# EAGLE board Transimpedance_Amp_SchnitzerLab (EAGLE 6.4)
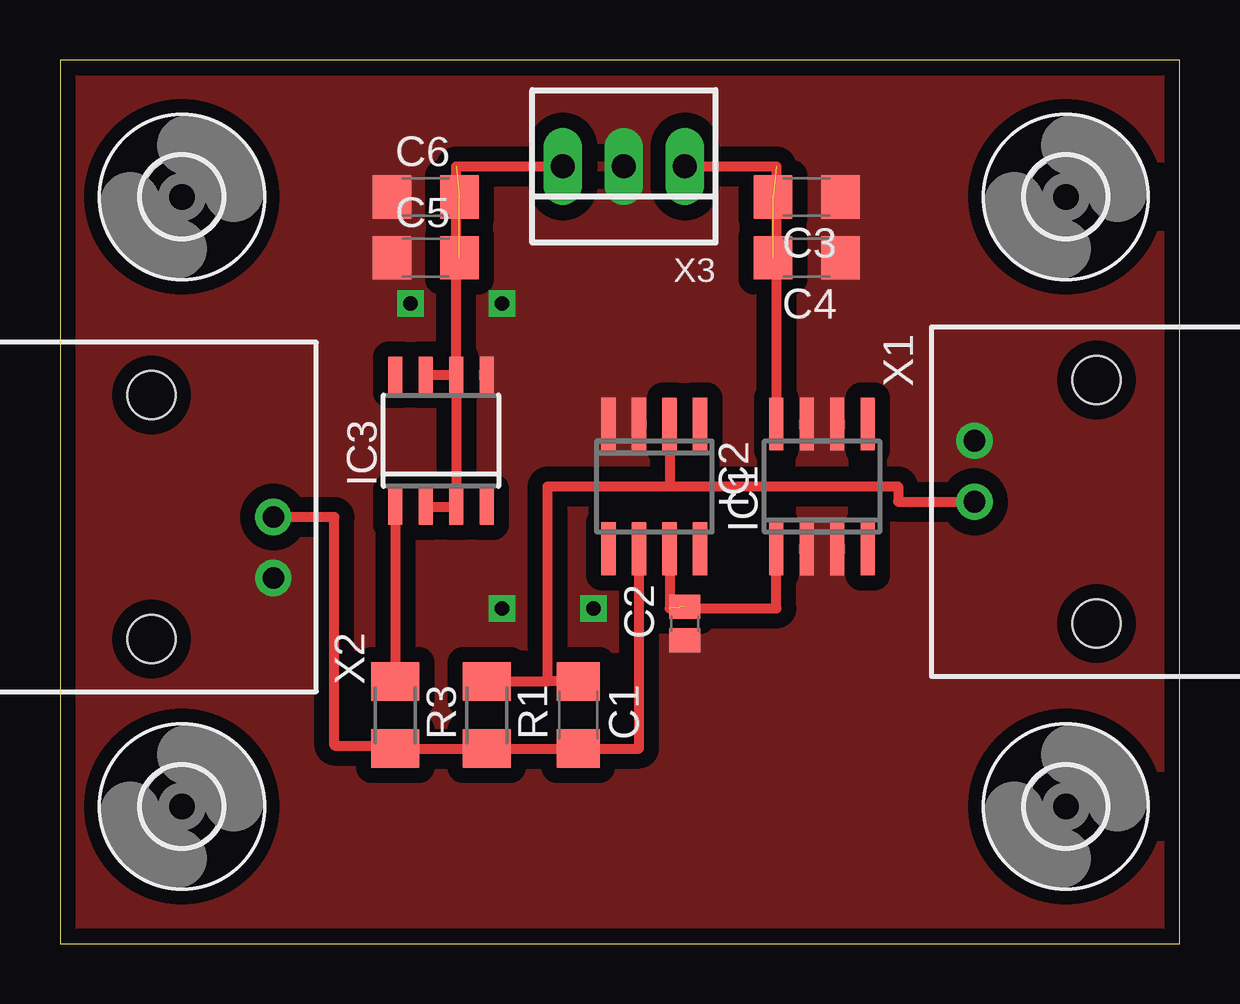
[diagram p0: board, top side]
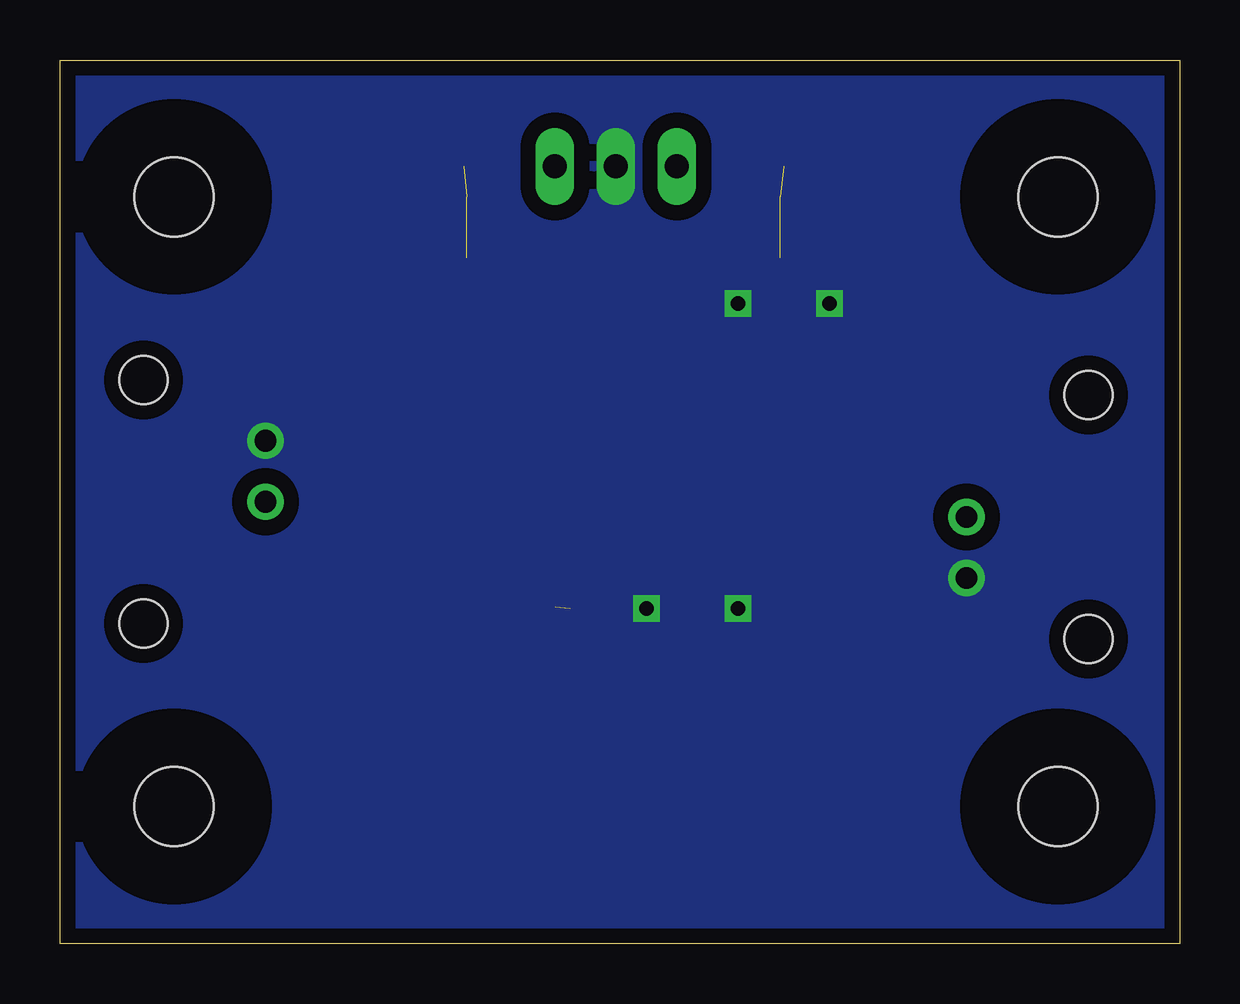
[diagram p1: board, bottom side, seen from below]

Size 46.66 x 36.82 mm. Coordinates in mm from the lower left corner, seen from the top.
Outline: 0,0 46.66,0 46.66,36.82 0,36.82 0,0
Copper layers (1*16): Top 0.035mm / dielectric 1.5mm / Bottom 0.035mm
Design rules "SparkFun *": minimum track width 25mil, minimum drill 20mil, track to track 25mil, track to pad 20mil, pad to pad 20mil, via to via 20mil, smd to smd 20mil, copper to edge 25mil, drill to drill 25mil, minimum pad ring 12mil, minimum via ring 10mil, stop-mask expansion 4mil, vias tented up to drill 25mil, thermal gap 0mil

## Footprints (pad centres in the part's own frame; a part is rotated, then mirrored left to right if it is on the bottom)
C1206 = smd 1.6 x 1.8: 1 -1.4,0; 2 1.4,0
C0504 = smd 1 x 1.3: 1 -0.7,0; 2 0.7,0
SO08 = smd 0.6 x 2.2: 1 -1.905,-2.6; 2 -0.635,-2.6; 3 0.635,-2.6; 4 1.905,-2.6; 5 1.905,2.6; 6 0.635,2.6; 7 -0.635,2.6; 8 -1.905,2.6
SOIC8 = smd 0.6 x 2.2: 1 -1.905,-2.6; 2 -0.635,-2.6; 3 0.635,-2.6; 4 1.905,-2.6; 5 1.905,2.6; 6 0.635,2.6; 7 -0.635,2.6; 8 -1.905,2.6
SOIC8' = smd 0.6 x 1.5: 1 -1.905,-2.75; 2 -0.635,-2.75; 3 0.635,-2.75; 4 1.905,-2.75; 5 1.905,2.75; 6 0.635,2.75; 7 -0.635,2.75; 8 -1.905,2.75
M1206 = smd 1.6 x 2: 1 -1.4,0; 2 1.4,0
3,3 = hole 3.3: 0,0
AMP_227161 = drill 0.9 pad 1.27: 1 0,-5.08; 2 -2.54,-5.08 | hole 2: -5.08,0; 5.08,0
22-23-2031 = drill 1 long: 1 -2.54,0; 2 0,0; 3 2.54,0

## Placement (x,y rotation side)
C1  [C1206]  21.59,9.52 270 top
C2  100nf  [C0504]  26.03,13.34 90 top
C3  6.8uf  [C1206]  31.11,31.12 180 top
C4  2.2uf  [C1206]  31.11,28.58 180 top
C5  2.2uf  [C1206]  15.24,28.58 0 top
C6  6.8uf  [C1206]  15.24,31.12 0 top
IC1  [SO08]  31.75,19.05 0 top
IC2  [SOIC8]  24.77,19.05 180 top
IC3  [SOIC8']  15.88,20.95 0 top
R1  [M1206]  17.78,9.52 270 top
R3  [M1206]  13.97,9.52 270 top
U$1  [3,3]  5.08,31.12 0 top
U$2  [3,3]  41.91,31.12 0 top
U$3  [3,3]  5.08,5.71 0 top
U$4  [3,3]  41.91,5.71 0 top
X1  [AMP_227161]  43.18,18.41 270 top
X2  [AMP_227161]  3.81,17.78 90 top
X3  [22-23-2031]  23.5,32.38 180 top

## Library data of the parts
C1-C6 R1 R3 = rcl
IC1 IC3 = linear
IC2 = Custom
U$1-U$4 = holes
X1 X2 = con-coax; MF: TYCO ELECTRONICS; MPN: 1-227161-6; OC_FARNELL: unknown; OC_NEWARK: 09H7854
X3 = con-molex; MF: MOLEX; MPN: 22-23-2031; OC_FARNELL: 1462950; OC_NEWARK: 30C0862

## Nets
+15V: C3.2 C4.2 IC1.8 X3.1
-5V: IC3.1 R3.1
-15V: C5.2 C6.2 IC3.2 IC3.3 IC3.6 IC3.7 X3.3
GND: C2.1 C3.1 C4.1 C5.1 C6.1 IC1.2 IC1.3 IC1.6 IC1.7 IC2.3 IC2.4 IC3.5 X1.2 X2.2 X3.2
N$1: C1.1 IC2.2 R1.1 X1.1
N$2: C1.2 IC2.6 R1.2 R3.2 X2.1
V+: C2.2 IC1.1 IC2.7

## Tracks (layer width: path | path; a pad name or v marks a point on that pad's centre or on a via)
+15V  (2 unrouted)
  Top 0.406: X3.1 29.84,32.38 IC1.8
-5V
  Top 0.406: IC3.1 R3.1
-15V  (2 unrouted)
  Top 0.406: IC3.2 IC3.3 IC3.6 | IC3.7 IC3.6 | IC3.6 16.51,32.38 X3.3
GND  (via drill 0.6)
  other vias: 18.41,13.97 18.41,26.67 14.61,26.67 22.22,13.97
  pour Top: 0.63,36.2 46.36,36.2 46.36,0.64 0.63,0.64
  pour Bottom: 0.63,36.2 46.36,36.2 46.36,0.64 0.63,0.64
N$1
  Top 0.406: R1.1 20.32,10.92 | C1.1 20.32,10.92 | 20.32,10.92 20.32,19.05 25.4,19.05 | IC2.2 25.4,19.05 | 25.4,19.05 34.92,19.05 34.92,18.41 X1.1
N$2
  Top 0.406: IC2.6 24.13,8.12 C1.2 R1.2 R3.2 13.97,8.25 11.43,8.25 11.43,17.78 X2.1
V+  (1 unrouted)
  Top 0.406: IC2.7 25.4,13.97 29.84,13.97 IC1.1